# EAGLE board knock_unlock (EAGLE 9.7.0)

Size 208.65 x 110.59 mm. Coordinates in mm from the lower left corner, seen from the top.
Outline: 0,0 208.65,0 208.65,110.59 0,110.59 0,0
Copper layers (1*16): Top 0.035mm / dielectric 1.5mm / Bottom 0.035mm
Design rules "default": minimum track width 6mil, minimum drill 0.35mm, track to track 6mil, track to pad 6mil, pad to pad 6mil, via to via 6mil, smd to smd 6mil, copper to edge 40mil, drill to drill 6mil, minimum pad ring 10mil, minimum via ring 8mil, stop-mask expansion 4mil, vias tented up to drill 0mil, thermal gap 10mil

## Footprints (pad centres in the part's own frame; a part is rotated, then mirrored left to right if it is on the bottom)
CAP-THRU-2.54MM = drill 1.016 pad 1.88: 1 -1.27,0; 2 1.27,0
LEDRD254W60D565H860B = drill 0.981 pad 1.581: 1 -1.27,0; 2 1.27,0
LED-RGB-5MM = drill 0.9: B 0.635,0.635; C -0.635,-0.635; G 1.905,-0.635; R -1.905,0.635
BATTERY-GENERIC = drill 1.118 pad 3.15 octagon: + 2.54,0; - -2.54,0
RESAD1016W63L850D250B = drill 0.83 pad 1.43: 1 -5.08,0; 2 5.08,0
SWITCH-MOMENTARY-PTH-6.5MM = drill 1.016 pad 1.88: 1 -3.251,2.261; 2 3.251,2.261; 3 -3.251,-2.261; 4 3.251,-2.261
SWITCH-SPDT-PTH-8.5X3.7MM = drill 1.016 pad 1.88: 1 -2.54,0; 2 0,0; 3 2.54,0
TO92 = drill 0.813 octagon: 1 -1.27,0; 2 0,1.905; 3 1.27,0
DIP762W53P254L1969H508Q14B = drill 0.743 pad 1.343: 1 -3.81,7.62; 2 -3.81,5.08; 3 -3.81,2.54; 4 -3.81,0; 5 -3.81,-2.54; 6 -3.81,-5.08; 7 -3.81,-7.62; 8 3.81,-7.62; 9 3.81,-5.08; 10 3.81,-2.54; 11 3.81,0; 12 3.81,2.54; 13 3.81,5.08; 14 3.81,7.62
DIP762W53P254L1969H508Q16B = drill 0.743 pad 1.343: 1 -3.81,8.89; 2 -3.81,6.35; 3 -3.81,3.81; 4 -3.81,1.27; 5 -3.81,-1.27; 6 -3.81,-3.81; 7 -3.81,-6.35; 8 -3.81,-8.89; 9 3.81,-8.89; 10 3.81,-6.35; 11 3.81,-3.81; 12 3.81,-1.27; 13 3.81,1.27; 14 3.81,3.81; 15 3.81,6.35; 16 3.81,8.89

## Placement (x,y rotation side)
C1  600u  [CAP-THRU-2.54MM]  103.56,6.1 180 top
C2  500n  [CAP-THRU-2.54MM]  74.27,92.73 90 top
D1  RED  [LEDRD254W60D565H860B]  142.93,17.53 270 top
D3  LED-RGBRCBG-PTH  [LED-RGB-5MM]  65.46,46.74 0 top
D12  RED  [LEDRD254W60D565H860B]  108.64,54.36 180 top
D13  RED  [LEDRD254W60D565H860B]  113.72,54.36 180 top
D14  RED  [LEDRD254W60D565H860B]  118.8,54.36 180 top
D15  RED  [LEDRD254W60D565H860B]  123.88,54.36 180 top
D16  RED  [LEDRD254W60D565H860B]  128.96,54.36 180 top
D17  RED  [LEDRD254W60D565H860B]  134.04,54.36 180 top
D18  RED  [LEDRD254W60D565H860B]  139.12,54.36 180 top
D19  RED  [LEDRD254W60D565H860B]  144.2,54.36 180 top
FUNC1  FUNCTION-GENERATOR  [BATTERY-GENERIC]  11.22,48.31 180 top
P3  BATTERYGENERIC  [BATTERY-GENERIC]  40.01,86.33 180 top
R1  100  [RESAD1016W63L850D250B]  97.21,8.64 0 top
R2  500  [RESAD1016W63L850D250B]  117.53,18.8 90 top
R3  28k  [RESAD1016W63L850D250B]  109.91,8.64 0 top
R4  500  [RESAD1016W63L850D250B]  130.23,18.8 90 top
R5  28k  [RESAD1016W63L850D250B]  122.61,8.64 0 top
R6  28k  [RESAD1016W63L850D250B]  135.31,8.64 0 top
R7  5k  [RESAD1016W63L850D250B]  104.83,21.34 90 top
R8  500  [RESAD1016W63L850D250B]  74.27,99.08 90 top
R9  20k  [RESAD1016W63L850D250B]  79.35,94 0 top
R10  20k  [RESAD1016W63L850D250B]  101.84,93.74 0 top
R11  215  [RESAD1016W63L850D250B]  84.43,101.62 90 top
R12  215  [RESAD1016W63L850D250B]  106.92,101.36 90 top
R13  215  [RESAD1016W63L850D250B]  129.78,101.36 90 top
R14  215  [RESAD1016W63L850D250B]  150.1,101.36 90 top
R15  20k  [RESAD1016W63L850D250B]  124.7,93.74 0 top
R16  20k  [RESAD1016W63L850D250B]  145.02,93.74 0 top
R17  10k  [RESAD1016W63L850D250B]  97.21,77.22 90 top
R18  500  [RESAD1016W63L850D250B]  33.11,48.71 0 top
R19  500  [RESAD1016W63L850D250B]  33.12,45.46 0 top
R21  1k  [RESAD1016W63L850D250B]  127.69,41.66 90 top
R22  1k  [RESAD1016W63L850D250B]  112.45,41.66 90 top
R23  1k  [RESAD1016W63L850D250B]  117.53,41.66 90 top
R24  1k  [RESAD1016W63L850D250B]  122.61,41.66 90 top
R25  1k  [RESAD1016W63L850D250B]  107.37,41.66 90 top
R26  1k  [RESAD1016W63L850D250B]  132.77,41.66 90 top
R27  1k  [RESAD1016W63L850D250B]  137.85,41.66 90 top
R28  1k  [RESAD1016W63L850D250B]  142.93,41.66 90 top
R29  10k  [RESAD1016W63L850D250B]  61.65,74.68 90 top
S1  SWITCH_MOMENTARY  [SWITCH-MOMENTARY-PTH-6.5MM]  64.19,60.71 90 top
S10  TOGGLE  [SWITCH-SPDT-PTH-8.5X3.7MM]  79.43,61.98 0 top
T1  NPN  [TO92]  114.99,6.1 180 top
T2  NPN  [TO92]  127.69,6.1 180 top
T3  NPN  [TO92]  140.39,6.1 180 top
T4  NPN  [TO92]  84.43,94 270 top
T5  NPN  [TO92]  106.92,93.74 270 top
T6  NPN  [TO92]  129.78,93.74 270 top
T7  NPN  [TO92]  150.1,93.74 270 top
U1  74HC04_PDIP  [DIP762W53P254L1969H508Q14B]  14.93,40.99 90 top
U2  74HC595_PDIP  [DIP762W53P254L1969H508Q16B]  93.4,58.17 90 top
U3  74HC04_PDIP  [DIP762W53P254L1969H508Q14B]  158.17,58.17 90 top
U4  74HC08_PDIP  [DIP762W53P254L1969H508Q14B]  175.95,58.17 90 top
U5  74HC08_PDIP  [DIP762W53P254L1969H508Q14B]  193.73,58.17 90 top

## Library data of the parts
C1 C2 D3 FUNC1 P3 R1-R19 R21-R29 S1 S10 U1-U5 = Tinkercad
D1 D12-D19 = Tinkercad; CATEGORY: Opto-Electronic; SUB-CATEGORY: LED; VALUE: LED_RED
T1-T7 = Tinkercad; CATEGORY: Transistor; SUB-CATEGORY: BJT; TYPE: NPN

## Nets
D1_C: D1.2 T3.1
D3_G: D3.G R19.2
D3_R: D3.R R18.2
D12_C: D12.2 R25.2
D13_C: D13.2 R22.2
D14_C: D14.2 R23.2
D15_C: D15.2 R24.2
D16_C: D16.2 R21.2
D17_C: D17.2 R26.2
D18_C: D18.2 R27.2
D19_C: D19.2 R28.2
FUNC1+: FUNC1.+ R8.2 R17.1 R18.1 U1.13 U2.11
P3+: D1.1 P3.+ R2.2 R4.2 R11.2 R12.2 R13.2 R14.2 S1.4 S10.1 U1.14 U2.16 U3.14 U4.14 U5.14
P3-: C2.1 D3.C FUNC1.- P3.- R7.2 R17.2 R21.1 R22.1 R23.1 R24.1 R25.1 R26.1 R27.1 R28.1 R29.2 S10.3 T1.3 T2.3 T3.3 T4.3 T5.3 T6.3 T7.3 U1.7 U2.8 U2.13 U3.7 U4.7 U5.7
R1_2: C1.2 R1.2
R3_1: C1.1 R3.1 R7.1
R9_1: C2.2 R8.1 R9.1
T1_B: R3.2 T1.2
T1_C: R2.1 R5.1 T1.1
T2_B: R5.2 T2.2
T2_C: R4.1 R6.1 T2.1
T3_B: R6.2 T3.2
T4_B: R9.2 T4.2
T4_C: R10.1 R11.1 T4.1
T5_B: R10.2 T5.2
T5_C: R12.1 R15.1 T5.1
T6_B: R15.2 T6.2
T6_C: R13.1 R16.1 T6.1
T7_B: R16.2 T7.2
U1_6Y: R19.1 U1.12
U2_!SRCLR: S10.2 U2.10
U2_Q0: D12.1 U2.15 U4.5
U2_Q1: D13.1 U2.1 U4.4
U2_Q2: D14.1 U2.2 U3.9
U2_Q3: D15.1 U2.3 U3.11
U2_Q4: D16.1 U2.4 U4.9
U2_Q5: D17.1 U2.5 U4.10
U2_Q6: D18.1 U2.6 U3.13
U2_Q7: D19.1 U2.7 U4.13
U2_RCLK: R14.1 T7.1 U2.12
U2_SER: R29.1 S1.2 U2.14
U3_4Y: U3.8 U4.2
U3_5Y: U3.10 U4.1
U3_6Y: U3.12 U4.12
U4_1Y: U4.3 U5.2
U4_2Y: U4.6 U5.1
U4_3Y: U4.8 U5.12
U4_4Y: U4.11 U5.13
U5_1Y: U5.3 U5.4
U5_2Y: R1.1 U5.6
U5_4Y: U5.5 U5.11

## Tracks (layer width: path | path; a pad name or v marks a point on that pad's centre or on a via)
D1_C  (1 unrouted)
D3_G  (1 unrouted)
D3_R  (1 unrouted)
D12_C  (1 unrouted)
D13_C  (1 unrouted)
D14_C  (1 unrouted)
D15_C  (1 unrouted)
D16_C  (1 unrouted)
D17_C  (1 unrouted)
D18_C  (1 unrouted)
D19_C  (1 unrouted)
FUNC1+  (5 unrouted)
P3+  (14 unrouted)
P3-  (28 unrouted)
R1_2  (1 unrouted)
R3_1  (2 unrouted)
R9_1  (2 unrouted)
T1_B  (1 unrouted)
T1_C  (2 unrouted)
T2_B  (1 unrouted)
T2_C  (2 unrouted)
T3_B  (1 unrouted)
T4_B  (1 unrouted)
T4_C  (2 unrouted)
T5_B  (1 unrouted)
T5_C  (2 unrouted)
T6_B  (1 unrouted)
T6_C  (2 unrouted)
T7_B  (1 unrouted)
U1_6Y  (1 unrouted)
U2_!SRCLR  (1 unrouted)
U2_Q0  (2 unrouted)
U2_Q1  (2 unrouted)
U2_Q2  (2 unrouted)
U2_Q3  (2 unrouted)
U2_Q4  (2 unrouted)
U2_Q5  (2 unrouted)
U2_Q6  (2 unrouted)
U2_Q7  (2 unrouted)
U2_RCLK  (2 unrouted)
U2_SER  (2 unrouted)
U3_4Y  (1 unrouted)
U3_5Y  (1 unrouted)
U3_6Y  (1 unrouted)
U4_1Y  (1 unrouted)
U4_2Y  (1 unrouted)
U4_3Y  (1 unrouted)
U4_4Y  (1 unrouted)
U5_1Y  (1 unrouted)
U5_2Y  (1 unrouted)
U5_4Y  (1 unrouted)